# Altium PCB Temp_sense_Project 2.0(right angle.PcbDoc (part 5 of 5)
Units mm, origin at the board's own origin, x right, y up, seen from the top; angles counter-clockwise.
Board outline 238.12 x 109.47 mm, 4 copper layers (Top Layer, Layer 1, Layer 2, Bottom Layer), stack 0.603 mm thick; 185 components, 161 nets, 944 pads, 283 vias.
Unrouted connection lines stored in the file: 2.
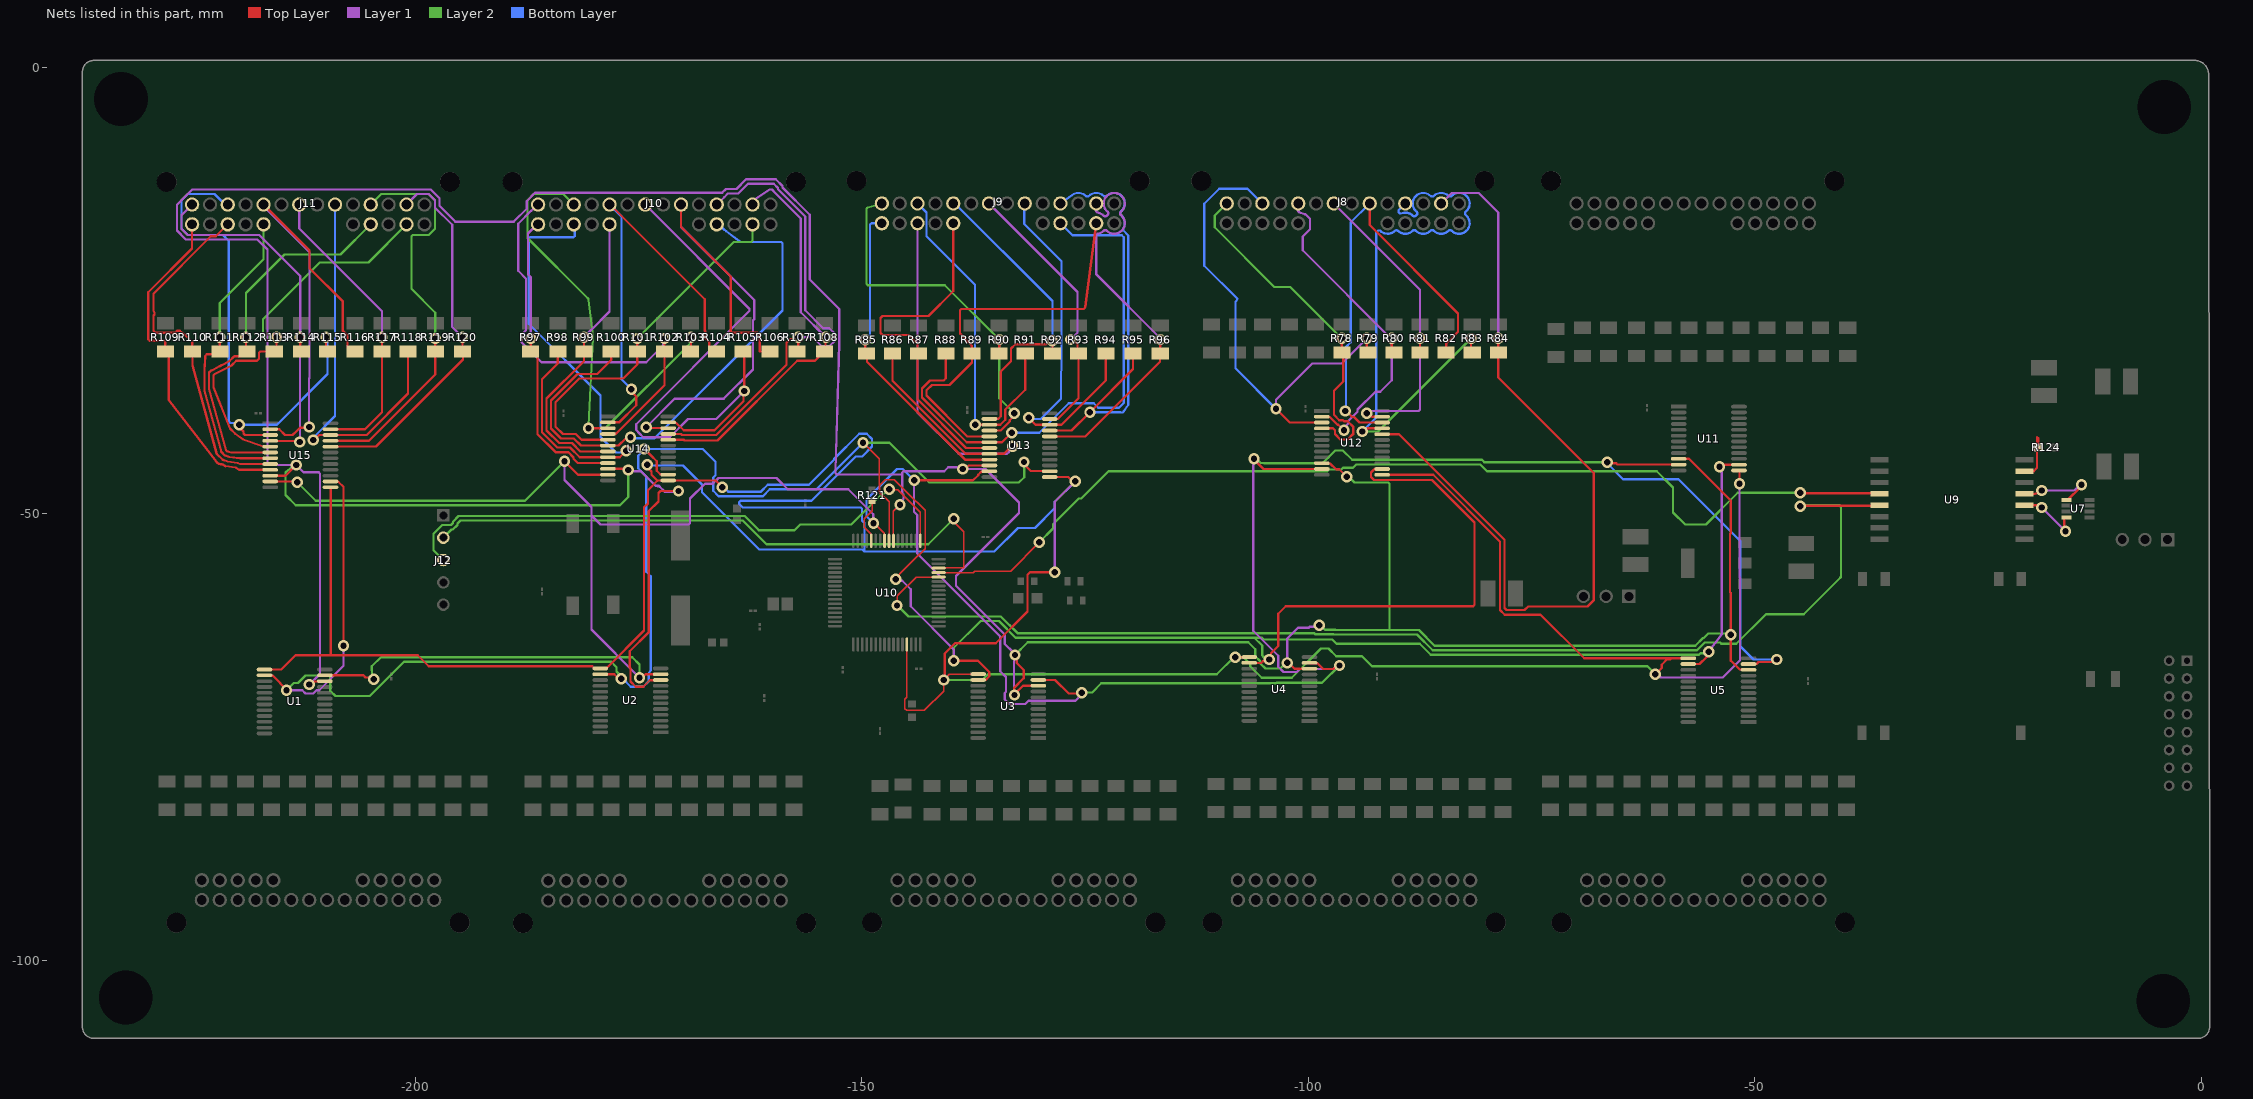
[diagram p6: the nets of this part, all layers, seen from the top]

## Via types
v1: diameter 1.27, hole 0.711, Top Layer to Bottom Layer, 278 vias
v2: diameter 0.711, hole 0.711, Top Layer to Bottom Layer, 4 vias
v3: diameter 1, hole 0.711, Top Layer to Bottom Layer, 1 vias

## Nets (pads, with @x,y where several pads share a name; then routed paths per layer and width w, separated by ;. In a path a pad name is that pad's centre, name@x,y a point inside that pad or via, vN(x,y) a via of type N, cw(c..) or ccw(c..) an arc to the next point about the centre after c; other vN are vias at no path point) (continued)
NetJ8_11: J8.11 R78.2 U12.4 | length 39.7
  Top Layer w0.254: U12.4@-98.489,-40.421 -97.232,-40.421 -97.019,-40.634 -97.019,-41.07 -96.424,-41.665 -95.582,-41.665 -94.987,-41.07 -94.987,-40.228 -95.582,-39.633 -95.995,-39.633 -96.122,-39.506 -96.535,-39.506 -97.13,-38.911 -97.13,-36.212 -96.105,-35.187 -96.105,-32.09 R78.2@-96.257,-31.937 v1(-96.257,-30.353)
  Layer 2 w0.254: J8.11@-109.135,-15.249 -110.481,-16.595 -110.481,-17.916 -103.808,-24.589 -102.021,-24.589 v1(-96.257,-30.353)
NetJ8_13: J8.13 R79.2 U12.3 | length 55.9
  Top Layer w0.254: v1(-103.623,-38.236) -102.088,-39.771 U12.3@-98.489,-39.771 ; v1(-93.463,-30.353) -93.463,-31.81 R79.2@-93.336,-31.937
  Layer 1 w0.254: v1(-103.623,-38.236) -103.623,-37.22 -99.555,-33.152 -96.261,-33.152 v1(-93.463,-30.353)
  Bottom Layer w0.254: J8.13@-105.147,-15.249 -106.798,-13.598 -109.973,-13.598 -111.646,-15.271 -111.646,-22.212 -107.941,-25.917 -108.125,-26.226 -108.16,-26.286 -108.16,-26.356 -108.16,-33.699 v1@-103.496,-38.363
NetJ8_15: J8.15 R80.2 U12.2 | length 37.9
  Top Layer w0.254: U12.2@-98.489,-39.121 -98.458,-39.152 -97.607,-39.152 -96.745,-40.014 -96.638,-40.014 v1(-96.003,-40.649) ; v1(-90.669,-30.353) -90.669,-31.683 R80.2@-90.415,-31.937
  Layer 1 w0.254: J8.15@-101.134,-15.249 -101.134,-16.128 -101.02,-16.241 -100.488,-16.439 -100.399,-16.455 -100.319,-16.455 -99.813,-16.961 -99.813,-17.281 -99.806,-17.288 -99.806,-18.127 -100.626,-18.947 -100.626,-20.498 v1@-90.796,-30.328 ; v1(-96.003,-40.649) -96.003,-40.374 -95.495,-39.866 -95.495,-39.564 -94.485,-38.554 -94.485,-38.326 -92.471,-36.313 -91.942,-36.313 -90.669,-35.04 v1(-90.669,-30.353)
NetJ8_17: J8.17 R81.2 U12.23 | length 36.7
  Top Layer w0.254: v1(-93.469,-38.747) -93.225,-38.747 -92.851,-39.121 U12.23@-91.739,-39.121 ; R81.2@-87.494,-31.937 v1(-87.494,-30.353)
  Layer 1 w0.254: J8.17@-97.146,-15.249 -87.494,-24.901 -87.494,-38.324 -87.643,-38.473 -92.92,-38.473 -93.194,-38.747 v1(-93.469,-38.747)
NetJ8_19: J8.19 R82.2 U12.22 | length 50.4
  Top Layer w0.254: v1(-95.854,-38.486) -95.735,-38.486 -95.076,-39.145 -94.897,-39.145 -94.282,-39.76 -93.55,-39.76 -93.539,-39.771 U12.22@-91.739,-39.771 ; J8.19@-93.133,-15.249 -93.133,-17.662 -83.239,-27.556 -83.239,-29.622 -84.573,-30.956 R82.2@-84.573,-31.937
  Bottom Layer w0.254: v1(-95.854,-38.486) -95.792,-38.424 -95.792,-31.325 -95.241,-30.774 -95.241,-17.357 J8.19@-93.133,-15.249
NetJ8_21: J8.21 R83.2 U12.21 | length 78.7
  Top Layer w0.254: v1(-93.971,-40.776) -93.696,-40.776 -93.341,-40.421 U12.21@-91.739,-40.421 ; v1(-81.779,-30.362) -81.779,-31.81 R83.2@-81.652,-31.937
  Layer 2 w0.254: v1(-93.971,-40.776) -92.193,-40.776 v1(-81.779,-30.362)
  Bottom Layer w0.254: v1(-93.971,-40.776) -92.402,-39.207 -92.402,-18.506 -92.179,-18.283 ; -89.908,-16.117 -89.908,-16.222 ; -89.908,-16.117 -89.908,-16.012 J8.21@-89.125,-15.229 ; -92.179,-18.283 -92.074,-18.283 -91.972,-18.283 ; -92.179,-18.283 -91.972,-18.283 ; -92.179,-18.283 -91.972,-18.283 ; -91.972,-18.283 ccw(c-91.126,-17.459) -90.31,-18.313 ; -91.972,-18.283 ccw(c-91.126,-17.459) -90.31,-18.313 ; -91.972,-18.283 ccw(c-91.126,-17.459) -90.31,-18.313 ; -90.31,-18.313 cw(c-90.136,-18.497) -89.96,-18.313 ccw(c-89.145,-17.459) -88.319,-18.303 cw(c-88.142,-18.485) -87.965,-18.303 ccw(c-87.138,-17.459) -86.312,-18.303 cw(c-86.135,-18.485) -85.958,-18.303 ccw(c-85.132,-17.459) -84.305,-18.303 cw(c-84.128,-18.485) -83.952,-18.303 ccw(c-83.125,-17.459) -82.372,-16.549 cw(c-82.209,-16.354) -82.372,-16.159 ccw(c-83.125,-15.249) -83.952,-14.405 cw(c-84.128,-14.223) -84.305,-14.405 ccw(c-85.132,-15.249) -85.958,-14.405 cw(c-86.135,-14.223) -86.312,-14.405 ccw(c-87.138,-15.249) -87.891,-16.159 cw(c-88.054,-16.354) -87.891,-16.549 ccw(c-87.138,-17.459) -87.965,-16.615 cw(c-88.142,-16.433) -88.318,-16.615 ; -89.908,-16.222 -89.833,-16.297 ; -89.908,-16.222 -89.833,-16.297 ; -89.908,-16.222 -89.833,-16.297 ; -89.833,-16.297 -89.759,-16.371 ; -89.833,-16.297 -89.759,-16.371 ; -89.833,-16.297 -89.759,-16.371 ; -89.759,-16.371 -89.654,-16.371 ; -89.653,-16.371 -89.445,-16.316 ; -89.653,-16.371 -89.445,-16.316 ; -89.653,-16.371 -89.445,-16.316 ; -89.445,-16.316 cw(c-89.145,-17.459) -88.318,-16.615 ; -89.445,-16.316 cw(c-89.145,-17.459) -88.318,-16.615 ; -89.445,-16.316 cw(c-89.145,-17.459) -88.318,-16.615
NetJ8_23: J8.23 R84.2 U12.20 | length 92.4
  Top Layer w0.254: U12.20@-91.739,-41.071 -89.857,-41.071 -78.032,-52.896 -78.032,-60.547 -77.809,-60.77 -75.791,-60.77 -75.383,-60.362 -68.736,-60.362 -68.063,-59.689 -68.063,-45.399 -78.731,-34.731 R84.2@-78.731,-31.937 v1(-78.731,-30.353)
  Layer 1 w0.254: J8.23@-85.132,-15.249 -83.951,-14.068 -80.928,-14.068 -78.731,-16.265 v1(-78.731,-30.353)
NetJ9_1: J9.1 R85.2 U13.9 | length 38.5
  Top Layer w0.254: U13.9@-135.7,-43.925 -138.447,-43.925 -149.398,-32.974 -149.398,-32.137 R85.2@-149.47,-32.064 R85.2@-149.597,-32.064 ; R85.2@-149.597,-32.064 v1(-149.597,-30.489) ; R85.2@-149.597,-32.064 v1(-149.597,-30.489) ; R85.2@-149.597,-32.064 v1(-149.597,-30.489)
  Bottom Layer w0.254: v1(-149.597,-30.489) -149.064,-29.956 -149.064,-17.608 -148.915,-17.459 J9.1@-147.743,-17.459
NetJ9_3: J9.3 R86.2 U13.8 | length 54.4
  Top Layer w0.254: R86.2@-146.549,-32.064 -146.549,-35.105 -138.379,-43.275 U13.8@-135.7,-43.275 -134.062,-43.275 -133.231,-42.444 v1(-133.11,-42.444)
  Layer 1 w0.254: J9.3@-143.755,-17.502 -143.755,-38.668 -139.148,-43.275 -133.728,-43.275 -133.549,-43.095 -133.549,-43.037 -133.11,-42.598 v1(-133.11,-42.444)
NetJ9_5: J9.5 R87.2 U13.7 | length 39.9
  Top Layer w0.254: J9.5@-139.742,-17.459 -139.742,-25.079 -142.518,-27.855 -147.66,-27.855 -147.883,-28.078 -147.883,-29.749 -147.66,-29.972 -144.739,-29.972 -143.755,-30.956 -143.755,-31.937 R87.2@-143.628,-32.064 -143.755,-32.191 -143.755,-37.18 -138.31,-42.625 U13.7@-135.7,-42.625
NetJ9_7: J9.7 R88.2 U13.6 | length 60.1
  Top Layer w0.254: R88.2@-140.58,-32.064 -140.58,-34.825 -140.816,-35.061 -142.354,-35.061 -143.247,-35.954 -143.247,-36.97 -138.242,-41.975 U13.6@-135.7,-41.975 -134.286,-41.975 v1(-133.214,-40.903)
  Bottom Layer w0.254: v1(-133.214,-40.903) -130.136,-40.903 -126.834,-37.601 -124.03,-37.601 -123.522,-38.109 -121.2,-38.109 -120.666,-37.576 -120.666,-19.034 -120.895,-18.805 -126.407,-18.805 J9.7@-127.753,-17.459
NetJ9_9: J9.9 R89.2 U13.5 | length 45.9
  Top Layer w0.254: R89.2@-137.668,-32.055 -137.668,-31.14 -139.005,-29.803 -139.005,-27.209 -138.856,-27.06 -125.235,-27.06 -125.161,-27.06 -125.013,-26.911 -124.983,-26.839 J9.9@-123.74,-17.459 ; R89.2@-137.659,-32.064 -137.659,-33.054 -140.174,-35.569 -142.144,-35.569 -142.739,-36.164 -142.739,-36.759 -138.173,-41.325 U13.5@-135.7,-41.325
NetJ9_11: J9.11 R90.2 U13.4 | length 42.1
  Top Layer w0.254: U13.4@-135.7,-40.675 -134.423,-40.675 -133.416,-39.668 -133.416,-39.527 -132.908,-39.019 v1(-132.908,-38.744) ; R90.2@-134.611,-32.064 v1(-134.611,-30.48)
  Layer 2 w0.254: J9.11@-147.743,-15.249 -149.287,-15.696 -149.349,-15.715 -149.396,-15.761 -149.47,-15.835 -149.47,-24.244 -149.321,-24.393 -140.698,-24.393 v1(-134.611,-30.48) -134.611,-37.041 v1(-132.908,-38.744)
NetJ9_13: J9.13 R91.2 U13.3 | length 39.4
  Top Layer w0.254: v1(-137.293,-40.007) -137.284,-40.016 -135.709,-40.016 U13.3@-135.7,-40.025 -134.491,-40.025 -133.924,-39.458 -133.924,-38.323 -131.69,-36.089 R91.2@-131.69,-32.064
  Bottom Layer w0.254: J9.13@-143.755,-15.249 -142.739,-16.265 -142.739,-18.932 -137.329,-24.342 -137.329,-39.971 v1(-137.293,-40.007)
NetJ9_15: J9.15 R92.2 U13.2 | length 69.2
  Top Layer w0.254: U13.2@-135.7,-39.375 -135.669,-39.344 -134.697,-39.344 -134.432,-39.079 -134.432,-34.055 -133.277,-32.9 -133.277,-31.473 -132.801,-30.997 -130.928,-30.997 -130.919,-31.006 -130.579,-31.006 ; -130.579,-30.997 -129.404,-30.997 -129.297,-30.89 -129.191,-30.89 v1@-128.917,-30.616 ; v1(-128.652,-30.616) v1@-128.917,-30.616 ; R92.2@-128.642,-32.064 v1@-128.642,-30.891 ; v1@-128.917,-30.616 v1@-128.642,-30.891 ; v1@-128.917,-30.616 v1@-128.642,-30.891 ; v1@-128.917,-30.616 v1@-128.642,-30.891
  Bottom Layer w0.254: v1(-128.652,-30.616) -128.642,-29.683 -128.642,-26.171 ; J9.15@-139.938,-14.875 -128.642,-26.171 ; J9.15@-139.938,-14.875 -128.642,-26.171 ; J9.15@-139.938,-14.875 -128.642,-26.171
NetJ9_17: J9.17 R93.2 U13.23 | length 30.9
  Top Layer w0.254: U13.23@-128.95,-39.375 -128.054,-39.375 -125.721,-37.042 R93.2@-125.721,-32.064 -125.848,-31.937 -125.848,-31.006 -126.374,-30.48 v1(-126.62,-30.48)
  Layer 1 w0.254: J9.17@-135.754,-15.249 -125.848,-25.155 -125.848,-29.708 v1(-126.62,-30.48)
NetJ9_19: J9.19 R94.2 U13.22 | length 42.2
  Top Layer w0.254: v1(-131.309,-39.252) -130.536,-40.025 U13.22@-128.95,-40.025 -127.637,-40.025 -122.673,-35.061 R94.2@-122.673,-32.064
  Bottom Layer w0.254: J9.19@-131.741,-15.249 -131.817,-15.325 -131.817,-17.535 -127.626,-21.726 -127.636,-30.059 -127.636,-30.901 -127.7,-37.117 -129.961,-39.377 -131.184,-39.377 v1(-131.309,-39.252)
NetJ9_21: J9.21 R95.2 U13.21 | length 57
  Top Layer w0.254: U13.21@-128.95,-40.675 -126.509,-40.675 v1(-124.451,-38.617) -119.625,-33.791 R95.2@-119.625,-32.064
  Bottom Layer w0.254: v1(-124.451,-38.617) -121.022,-38.617 -120.999,-38.64 -120.788,-38.64 -120.69,-38.542 -120.158,-37.786 -120.158,-18.823 -120.728,-18.253 -120.728,-18.148 -120.728,-18.08 ccw(c-121.733,-17.459) -120.98,-16.549 cw(c-120.817,-16.354) -120.98,-16.159 ccw(c-121.733,-15.249) -122.56,-14.405 cw(c-122.736,-14.223) -122.913,-14.405 ccw(c-123.74,-15.249) -124.566,-14.405 cw(c-124.743,-14.223) -124.92,-14.406 ; J9.21@-127.753,-15.249 -126.442,-14.295 ; J9.21@-127.753,-15.249 -126.442,-14.295 ; J9.21@-127.753,-15.249 -126.442,-14.295 ; -126.442,-14.295 cw(c-125.746,-15.249) -124.92,-14.406 ; -126.442,-14.295 cw(c-125.746,-15.249) -124.92,-14.406 ; -126.442,-14.295 cw(c-125.746,-15.249) -124.92,-14.406
NetJ9_23: J9.23 R96.2 U13.20 | length 58
  Top Layer w0.254: U13.20@-128.95,-41.325 -124.966,-41.325 -116.615,-32.974 -116.615,-32.103 R96.2@-116.577,-32.064 v1(-116.577,-30.48)
  Layer 1 w0.254: J9.23@-123.74,-15.249 -123.74,-16.152 -123.665,-16.226 ccw(c-123.486,-16.046) -123.664,-16.227 ; v1(-116.577,-30.48) -116.577,-30.337 -123.665,-23.248 -123.74,-23.174 -123.74,-18.766 -123.665,-18.692 ; -123.665,-18.692 -123.606,-18.632 ; -123.665,-18.692 -123.606,-18.632 ; -123.665,-18.692 -123.606,-18.632 ; -123.664,-16.227 -123.329,-16.352 ; -123.664,-16.227 -123.329,-16.352 ; -123.664,-16.227 -123.329,-16.352 ; -123.606,-18.632 ccw(c-123.74,-17.459) -122.913,-18.302 ; -123.606,-18.632 ccw(c-123.74,-17.459) -122.913,-18.302 ; -123.606,-18.632 ccw(c-123.74,-17.459) -122.913,-18.302 ; -123.329,-16.352 cw(c-123.74,-17.459) -122.913,-16.615 ccw(c-122.736,-16.433) -122.56,-16.615 cw(c-121.733,-17.459) -122.486,-16.549 ccw(c-122.649,-16.354) -122.486,-16.159 cw(c-121.733,-15.249) -120.98,-16.159 ccw(c-120.817,-16.354) -120.98,-16.549 ; -122.913,-18.302 cw(c-122.736,-18.485) -122.56,-18.303 ; -122.913,-18.302 cw(c-122.736,-18.485) -122.56,-18.303 ; -122.913,-18.302 cw(c-122.736,-18.485) -122.56,-18.303 ; -122.56,-18.303 ccw(c-121.733,-17.459) -120.98,-16.549 ; -122.56,-18.303 ccw(c-121.733,-17.459) -120.98,-16.549 ; -122.56,-18.303 ccw(c-121.733,-17.459) -120.98,-16.549
NetJ10_1: J10.1 R97.2 U14.9 | length 37.4
  Top Layer w0.254: v1(-187.062,-30.362) R97.2@-187.062,-31.81 -186.851,-31.81 -186.3,-32.361 -186.3,-41.074 -184.289,-43.085 -182.854,-43.085 -182.259,-43.68 -182.259,-43.832 -181.785,-44.306 U14.9@-178.626,-44.306
  Layer 1 w0.254: v1(-187.062,-30.362) -187.062,-23.468 -187.367,-23.163 -187.367,-18.602 ; J10.1@-185.932,-17.167 -186.132,-17.455 J10.1@-186.22,-17.455 ; -187.367,-18.602 J10.1@-186.22,-17.455 ; -187.367,-18.602 J10.1@-186.22,-17.455 ; -187.367,-18.602 J10.1@-186.22,-17.455
NetJ10_3: J10.3 R98.2 U14.8 | length 56.5
  Top Layer w0.254: R98.2@-184.014,-31.81 -184.014,-33.156 -185.792,-34.934 -185.792,-40.863 -184.078,-42.577 -182.644,-42.577 -181.565,-43.656 U14.8@-178.413,-43.656 -177.085,-43.656 v1(-176.364,-42.935)
  Bottom Layer w0.254: J10.3@-182.236,-17.586 -182.118,-18.009 -182.109,-18.018 -182.109,-18.203 -182.109,-18.889 -182.258,-19.038 -187.116,-19.038 -187.265,-19.187 -187.265,-28.722 -179.239,-36.748 -179.239,-41.395 -177.507,-43.127 -176.556,-43.127 v1(-176.364,-42.935)
NetJ10_5: J10.5 R99.2 U14.7 | length 33.6
  Top Layer w0.254: v1(-181.093,-30.235) -181.093,-32.902 -185.284,-37.093 -185.284,-40.653 -183.868,-42.069 -182.433,-42.069 -181.496,-43.006 U14.7@-178.626,-43.006
  Layer 1 w0.254: v1(-181.093,-30.235) -180.29,-29.423 cw(c-180.11,-29.602) -180.289,-29.422 -178.223,-27.356 J10.5@-178.223,-17.586
NetJ10_7: J10.7 R100.2 U14.6 | length 62.9
  Top Layer w0.254: R100.2@-178.045,-31.81 -178.045,-32.775 -179.618,-34.348 -181.82,-34.348 -184.776,-37.303 -184.776,-40.442 -183.657,-41.561 -182.223,-41.561 -181.428,-42.356 U14.6@-178.413,-42.356 -177.222,-42.356 -176.471,-41.605 -176.08,-41.605 v1(-175.886,-41.411)
  Bottom Layer w0.254: v1(-175.886,-41.411) -175.759,-41.538 -173.188,-41.538 -158.868,-27.218 -158.868,-19.716 -159.017,-19.567 -163.462,-19.567 -163.567,-19.567 -165.159,-18.362 -165.352,-18.216 ; J10.7@-166.234,-17.586 -165.813,-17.586 J10.7@-165.739,-17.66 ; J10.7@-165.739,-17.66 J10.7@-165.693,-17.706 ; J10.7@-165.739,-17.66 J10.7@-165.693,-17.706 ; J10.7@-165.739,-17.66 J10.7@-165.693,-17.706 ; J10.7@-165.693,-17.706 ccw(c-164.785,-17.467) -165.352,-18.216 ; J10.7@-165.693,-17.706 ccw(c-164.785,-17.467) -165.352,-18.216 ; J10.7@-165.693,-17.706 ccw(c-164.785,-17.467) -165.352,-18.216
NetJ10_9: J10.9 R101.2 U14.5 | length 42.1
  Top Layer w0.254: U14.5@-178.626,-41.706 -181.359,-41.706 -182.012,-41.053 -183.447,-41.053 -184.268,-40.232 -184.268,-37.514 -181.61,-34.856 -176.697,-34.856 -175.124,-33.283 R101.2@-175.124,-31.81 v1(-175.124,-30.362)
  Layer 2 w0.254: v1(-175.124,-30.362) -164.329,-19.567 -162.37,-19.567 -162.221,-19.418 J10.9@-162.221,-17.586
NetJ10_11: J10.11 R102.2 U14.4 | length 49.2
  Top Layer w0.254: U14.4@-178.413,-41.056 -178.382,-41.025 -177.512,-41.025 -172.076,-35.59 R102.2@-172.076,-31.81 v1(-172.076,-30.362)
  Layer 1 w0.254: J10.11@-186.224,-15.376 -186.287,-15.376 -186.986,-16.074 -187.025,-16.074 -188.459,-17.508 -188.459,-17.789 -188.459,-22.79 -187.57,-23.679 -187.57,-29.433 -188.078,-29.941 -188.078,-30.783 -185.832,-33.029 -174.108,-33.029 -172.223,-31.144 -172.223,-30.509 v1(-172.076,-30.362)
NetJ10_13: J10.13 R103.2 U14.3 | length 129.5
  Top Layer w0.254: v1(-180.585,-40.395) -180.579,-40.401 -178.632,-40.401 U14.3@-178.626,-40.406 ; R103.2@-169.155,-31.81 -169.104,-31.76 v1(-169.104,-30.226)
  Layer 2 w0.254: J10.13@-182.236,-15.376 -183.417,-14.195 -186.713,-14.195 -187.405,-14.887 -187.405,-19.103 ; v1(-169.104,-30.226) v1@-169.104,-30.714 ; -187.405,-19.103 -180.659,-25.848 ; -187.405,-19.103 -180.659,-25.848 ; -187.405,-19.103 -180.659,-25.848 ; -180.659,-25.848 cw(c-180.839,-26.028) -180.585,-26.028 ; -180.659,-25.848 cw(c-180.839,-26.028) -180.585,-26.028 ; -180.659,-25.848 cw(c-180.839,-26.028) -180.585,-26.028 ; v1(-180.585,-40.395) -178.68,-40.395 ; v1(-180.585,-40.395) v1@-180.585,-40.141 ; v1(-180.585,-40.395) v1@-180.585,-40.141 ; v1(-180.585,-40.395) v1@-180.585,-40.141 ; v1@-180.585,-40.141 cw(c-180.331,-40.141) v1@-180.585,-40.128 ; v1@-180.585,-40.141 cw(c-180.331,-40.141) v1@-180.585,-40.128 ; v1@-180.585,-40.141 cw(c-180.331,-40.141) v1@-180.585,-40.128 ; v1@-180.585,-40.128 -180.078,-30.287 ; v1@-180.585,-40.128 -180.078,-30.287 ; v1@-180.585,-40.128 -180.078,-30.287 ; -180.585,-26.028 ccw(c-180.331,-26.028) -180.583,-26.059 ; -180.585,-26.028 ccw(c-180.331,-26.028) -180.583,-26.059 ; -180.585,-26.028 ccw(c-180.331,-26.028) -180.583,-26.059 ; -180.583,-26.059 -180.085,-30.111 ; -180.583,-26.059 -180.085,-30.111 ; -180.583,-26.059 -180.085,-30.111 ; -180.085,-30.111 cw(c-181.093,-30.235) -180.078,-30.287 ; -180.085,-30.111 cw(c-181.093,-30.235) -180.078,-30.287 ; -180.085,-30.111 cw(c-181.093,-30.235) -180.078,-30.287 ; -178.68,-40.395 -169.178,-30.893 ; -178.68,-40.395 -169.178,-30.893 ; -178.68,-40.395 -169.178,-30.893 ; -169.178,-30.893 ccw(c-169.358,-30.714) v1@-169.104,-30.714 ; -169.178,-30.893 ccw(c-169.358,-30.714) v1@-169.104,-30.714 ; -169.178,-30.893 ccw(c-169.358,-30.714) v1@-169.104,-30.714
NetJ10_15: J10.15 R104.2 U14.2 | length 81.7
  Top Layer w0.254: U14.2@-178.413,-39.756 -177.156,-39.756 -175.251,-37.851 -175.251,-36.86 -175.779,-36.332 v1(-175.779,-36.057) ; R104.2@-166.234,-31.81 R104.2@-167.06,-31.81 ; J10.15@-178.197,-15.351 -167.568,-25.98 ; J10.15@-178.197,-15.351 -167.568,-25.98 ; J10.15@-178.197,-15.351 -167.568,-25.98 ; -167.568,-25.98 -167.568,-29.495 -167.504,-29.559 -167.504,-30.32 -167.06,-30.764 ; R104.2@-167.06,-31.81 -167.06,-30.764 ; R104.2@-167.06,-31.81 -167.06,-30.764 ; R104.2@-167.06,-31.81 -167.06,-30.764
  Bottom Layer w0.254: J10.15@-178.223,-15.376 -176.902,-16.697 -176.902,-34.934 v1(-175.779,-36.057)
NetJ10_17: J10.17 R105.2 U14.23 | length 65.8
  Top Layer w0.254: U14.23@-171.662,-39.756 -171.631,-39.787 -170.849,-39.787 -170.818,-39.818 -170.749,-39.818 -169.918,-40.649 -166.488,-40.649 -163.226,-37.387 -163.226,-36.324 v1(-163.146,-36.244) ; R105.2@-163.313,-31.81 -163.146,-31.977 v1@-163.146,-36.204 ; v1@-163.166,-36.224 v1@-163.146,-36.204 ; v1@-163.166,-36.224 v1@-163.146,-36.204 ; v1@-163.166,-36.224 v1@-163.146,-36.204 ; v1@-163.166,-36.224 v1@-163.146,-36.204 ; v1@-163.166,-36.224 v1@-163.146,-36.204
  Layer 1 w0.254: J10.17@-174.235,-15.376 -162.549,-27.062 -162.549,-27.272 -175.251,-39.974 -175.251,-40.609 -174.87,-40.99 -174.45,-41.411 -171.485,-41.411 -169.453,-39.379 -166.281,-39.379 v1(-163.146,-36.244)
NetJ10_19: J10.19 R106.2 U14.22 | length 62
  Top Layer w0.254: v1(-174.129,-40.295) -174.049,-40.375 -171.907,-40.375 U14.22@-171.876,-40.406 ; J10.19@-170.222,-15.376 -170.222,-17.865 -164.659,-23.428 -164.659,-29.727 -161.66,-29.727 -161.408,-29.979 -161.408,-31.81 R106.2@-160.265,-31.81
  Layer 1 w0.254: v1(-174.129,-40.295) -174.129,-40.289 -170.958,-37.118 -165.458,-37.118 -162.17,-33.831 -162.17,-28.33 -162.041,-28.201 -162.041,-26.061 -170.222,-17.88 J10.19@-170.222,-15.188
NetJ10_21: J10.21 R107.2 U14.21 | length 55.1
  Top Layer w0.254: U14.21@-171.662,-41.056 -170.229,-41.056 -170.129,-41.157 -166.278,-41.157 -158.423,-33.302 -158.423,-30.847 -157.997,-30.421 -157.284,-30.421 v1(-157.09,-30.226) -157.09,-31.683 R107.2@-157.217,-31.81
  Layer 1 w0.254: J10.21@-166.234,-15.376 -165.4,-14.543 -164.984,-14.126 -164.395,-14.126 -163.807,-14.126 -162.728,-13.048 -159.843,-13.048 -159.376,-13.515 -159.376,-13.667 -156.328,-16.715 -156.328,-27.205 -154.323,-29.21 -153.621,-29.21 -153.026,-29.805 -153.026,-30.647 -153.621,-31.242 -154.463,-31.242 -155.479,-30.226 v1(-157.09,-30.226)
NetJ10_23: J10.23 R108.2 U14.20 | length 45.2
  Top Layer w0.254: U14.20@-171.662,-41.706 -169.933,-41.706 -169.847,-41.792 -166.151,-41.792 -157.228,-32.869 -155.228,-32.869 R108.2@-154.169,-31.81 -154.042,-31.683 v1(-154.042,-30.226)
  Layer 1 w0.254: J10.23@-162.221,-15.376 -161.901,-14.738 -160.273,-13.696 -160.033,-13.696 -159.884,-13.845 -159.884,-13.878 -156.836,-16.926 -156.836,-27.416 -154.042,-30.21 v1(-154.042,-30.226)
NetJ11_1: J11.1 R109.2 U15.9 | length 39.5
  Top Layer w0.254: J11.1@-224.959,-17.586 -224.959,-20.296 -229.861,-25.199 -229.861,-30.461 -229.712,-30.61 -228.105,-30.61 -227.956,-30.759 R109.2@-227.956,-31.81 -227.587,-32.361 -227.587,-37.208 -222.212,-44.187 ccw(c-221.667,-43.767) -221.645,-44.454 ; U15.9@-216.218,-45.068 -219.665,-45.068 -220.092,-44.799 -221.212,-44.652 ; -221.645,-44.454 cw(c-221.709,-44.991) -221.348,-44.589 ; -221.645,-44.454 cw(c-221.709,-44.991) -221.348,-44.589 ; -221.645,-44.454 cw(c-221.709,-44.991) -221.348,-44.589 ; -221.348,-44.589 -221.346,-44.591 ; -221.348,-44.589 -221.346,-44.591 ; -221.348,-44.589 -221.346,-44.591 ; -221.346,-44.591 ccw(c-221.178,-44.401) -221.212,-44.652 ; -221.346,-44.591 ccw(c-221.178,-44.401) -221.212,-44.652 ; -221.346,-44.591 ccw(c-221.178,-44.401) -221.212,-44.652
NetJ11_3: J11.3 R110.2 U15.8 | length 42.2
  Top Layer w0.254: J11.3@-220.971,-17.586 -222.317,-18.932 -222.876,-18.932 -229.29,-25.346 -229.29,-27.243 -229.29,-27.285 -229.17,-27.493 -229.17,-27.704 -229.239,-27.773 -229.29,-27.824 -229.29,-29.495 -229.067,-29.718 -226.845,-29.718 -226.662,-29.535 -226.63,-29.503 -226.419,-29.503 -226.333,-29.508 -225.855,-29.854 -225.79,-29.908 -224.957,-30.74 ; U15.8@-216.218,-44.418 -219.597,-44.418 -219.865,-44.295 -221.001,-44.145 -221.383,-43.982 -221.532,-43.949 -222.191,-43.29 -224.899,-33.473 -224.908,-33.405 R110.2@-224.908,-31.81 R110.2@-224.957,-31.81 ; R110.2@-224.957,-31.81 -224.957,-30.74 ; R110.2@-224.957,-31.81 -224.957,-30.74 ; R110.2@-224.957,-31.81 -224.957,-30.74
NetJ11_5: J11.5 R111.2 U15.7 | length 34.8
  Top Layer w0.254: v1(-221.86,-30.226) R111.2@-221.86,-31.81 -222.186,-32.137 -223.321,-32.137 -223.499,-32.315 -223.574,-33.974 -223.574,-36.224 -221.683,-43.08 -221.297,-43.465 -221.163,-43.499 -220.805,-43.632 ; U15.7@-216.218,-43.768 -219.59,-43.768 -220.781,-43.636 ; -220.805,-43.632 ccw(c-220.753,-43.383) -220.781,-43.636 ; -220.805,-43.632 ccw(c-220.753,-43.383) -220.781,-43.636 ; -220.805,-43.632 ccw(c-220.753,-43.383) -220.781,-43.636
  Layer 2 w0.254: v1(-221.86,-30.226) -221.86,-26.402 -216.958,-21.5 J11.5@-216.958,-17.586
NetJ11_7: J11.7 R112.2 U15.6 | length 60.2
  Top Layer w0.254: R112.2@-218.812,-31.81 -218.9,-31.869 R112.2@-219.638,-32.361 ; -222.738,-33.931 -222.777,-33.942 -222.841,-33.96 -222.889,-34.007 -222.991,-34.11 -223.038,-34.156 -223.066,-34.268 -223.066,-36.014 -221.175,-42.869 -221.052,-42.992 ; -222.738,-33.931 -221.855,-33.468 ; -222.738,-33.931 -221.855,-33.468 ; -222.738,-33.931 -221.855,-33.468 ; -221.855,-33.468 ccw(c-221.974,-33.243) -221.812,-33.438 ; -221.855,-33.468 ccw(c-221.974,-33.243) -221.812,-33.438 ; -221.855,-33.468 ccw(c-221.974,-33.243) -221.812,-33.438 ; -221.812,-33.438 ccw(c-221.974,-33.243) -221.809,-33.436 ; -221.812,-33.438 ccw(c-221.974,-33.243) -221.809,-33.436 ; -221.812,-33.438 ccw(c-221.974,-33.243) -221.809,-33.436 ; -221.808,-33.436 cw(c-221.643,-33.629) -221.765,-33.406 ; -221.808,-33.436 cw(c-221.643,-33.629) -221.765,-33.406 ; -221.808,-33.436 cw(c-221.643,-33.629) -221.765,-33.406 ; -221.765,-33.406 -221.704,-33.372 ; -221.765,-33.406 -221.704,-33.372 ; -221.765,-33.406 -221.704,-33.372 ; -221.704,-33.372 -220.749,-32.869 ; -221.052,-42.992 -220.59,-43.115 ; -221.052,-42.992 -220.59,-43.115 ; -221.052,-42.992 -220.59,-43.115 ; -220.749,-32.869 -220.316,-32.436 ; -220.749,-32.869 -220.316,-32.436 ; -220.749,-32.869 -220.316,-32.436 ; -220.59,-43.115 ccw(c-220.554,-42.864) -220.554,-43.118 ; -220.59,-43.115 ccw(c-220.554,-42.864) -220.554,-43.118 ; -220.59,-43.115 ccw(c-220.554,-42.864) -220.554,-43.118 ; -220.554,-43.118 U15.6@-216.218,-43.118 ; -220.554,-43.118 U15.6@-216.218,-43.118 ; -220.554,-43.118 U15.6@-216.218,-43.118 ; -220.316,-32.436 cw(c-220.137,-32.616) -220.139,-32.362 ; -220.316,-32.436 cw(c-220.137,-32.616) -220.139,-32.362 ; -220.316,-32.436 cw(c-220.137,-32.616) -220.139,-32.362 ; -220.139,-32.362 -220.036,-32.361 ; -220.036,-32.361 cw(c-220.031,-32.869) -220.031,-32.361 ; -220.036,-32.361 cw(c-220.031,-32.869) -220.031,-32.361 ; -220.036,-32.361 cw(c-220.031,-32.869) -220.031,-32.361 ; -220.031,-32.361 R112.2@-219.638,-32.361 ; -220.031,-32.361 R112.2@-219.638,-32.361 ; -220.031,-32.361 R112.2@-219.638,-32.361 ; R112.2@-218.939,-31.81 v1(-218.939,-30.235) ; R112.2@-218.939,-31.81 v1(-218.939,-30.235) ; R112.2@-218.939,-31.81 v1(-218.939,-30.235)
  Layer 2 w0.254: v1(-218.939,-30.235) -218.939,-25.282 -214.621,-20.964 -208.347,-20.964 J11.7@-204.969,-17.586
NetJ11_9: J11.9 R113.2 U15.5 | length 45.1
  Top Layer w0.254: U15.5@-216.218,-42.468 -216.887,-42.468 -217.131,-42.407 -219.244,-41.676 -220.122,-41.03 -220.717,-40.435 -222.557,-35.825 -222.558,-35.803 -222.558,-34.566 -222.558,-34.478 -222.42,-34.34 -220.539,-33.377 -220.031,-32.869 -217.701,-32.869 -217.478,-32.646 -217.478,-31.959 -217.329,-31.81 R113.2@-215.764,-31.81 -215.51,-31.556 v1(-215.51,-30.235)
  Layer 2 w0.254: v1(-215.51,-30.235) -216.78,-30.235 -217.034,-29.981 -217.034,-28.203 -210.684,-21.853 -205.223,-21.853 J11.9@-200.956,-17.586
NetJ11_11: J11.11 R114.2 U15.4 | length 42.3
  Top Layer w0.254: U15.4@-216.218,-41.818 -216.187,-41.849 -213.004,-41.849 v1(-212.896,-41.957) ; v1(-212.843,-30.235) -212.843,-31.683 R114.2@-212.716,-31.81
  Layer 1 w0.254: J11.11@-224.959,-15.376 -226.14,-16.557 -226.14,-18.075 -225.448,-18.767 -217.447,-18.767 -212.843,-23.371 v1(-212.843,-30.235) -212.881,-30.273 -212.881,-41.942 v1(-212.896,-41.957)
NetJ11_13: J11.13 R115.2 U15.3 | length 59
  Top Layer w0.254: v1(-219.701,-40.014) -219.701,-40.289 -219.214,-40.776 -219.214,-40.988 -219.034,-41.168 U15.3@-216.218,-41.168 ; v1(-209.973,-30.235) -209.973,-31.633 R115.2@-209.795,-31.81
  Bottom Layer w0.254: v1(-209.973,-30.235) -209.795,-30.413 -209.795,-34.352 -215.457,-40.014 v1(-219.701,-40.014) -219.895,-39.82 -220.657,-39.82 -220.844,-39.633 -220.844,-19.424 -221.501,-18.767 -225.448,-18.767 -226.14,-18.075 -226.14,-14.887 -225.448,-14.195 -222.463,-14.195 -221.566,-15.092 J11.13@-221.544,-15.092 ; J11.13@-221.544,-15.092 J11.13@-221.352,-14.899 ; J11.13@-221.544,-15.092 J11.13@-221.352,-14.899 ; J11.13@-221.544,-15.092 J11.13@-221.352,-14.899
NetJ11_15: J11.15 R116.2 U15.2 | length 52.6
  Top Layer w0.254: J11.15@-216.958,-15.376 -211.827,-20.507 -211.827,-22.488 -208.081,-26.234 -208.081,-29.495 -207.573,-30.003 -207.573,-31.26 -207.022,-31.81 R116.2@-206.747,-31.81 ; U15.2@-216.218,-40.518 -215.209,-40.518 -214.569,-41.158 -213.727,-41.158 -213.599,-41.03 -213.565,-41.03 -212.881,-40.346 -211.93,-40.346 v1(-211.865,-40.28)
  Layer 1 w0.254: J11.15@-216.907,-15.63 -211.827,-20.71 -211.827,-34.794 -211.865,-34.831 v1(-211.865,-40.28)
NetJ11_17: J11.17 R117.2 U15.23 | length 33.6
  Top Layer w0.254: U15.23@-209.468,-40.518 -205.6,-40.518 -203.699,-38.617 R117.2@-203.699,-31.81 v1(-203.699,-30.226)
  Layer 1 w0.254: J11.17@-212.97,-15.376 -212.97,-18.043 -203.699,-27.314 v1(-203.699,-30.226)
NetJ11_19: J11.19 R118.2 U15.22 | length 44.8
  Top Layer w0.254: v1(-211.389,-41.728) -211.285,-41.728 -210.725,-41.168 U15.22@-209.468,-41.168 -205.412,-41.168 -200.778,-36.534 R118.2@-200.778,-31.81
  Bottom Layer w0.254: v1(-211.389,-41.728) -211.389,-41.481 -208.957,-39.049 J11.19@-208.957,-15.376
NetJ11_21: J11.21 R119.2 U15.21 | length 45.5
  Top Layer w0.254: U15.21@-209.468,-41.818 -205.147,-41.818 -197.73,-34.401 R119.2@-197.73,-31.81 v1(-197.73,-30.362)
  Layer 2 w0.254: J11.21@-204.969,-15.376 -203.788,-14.195 -198.46,-14.195 -197.768,-14.887 -197.768,-18.075 -198.46,-18.767 -200.248,-18.767 -200.397,-18.916 -200.397,-24.807 -197.73,-27.474 v1(-197.73,-30.362)
NetJ11_23: J11.23 R120.2 U15.20 | length 42
  Top Layer w0.254: U15.20@-209.468,-42.468 -204.375,-42.468 -194.627,-32.72 -194.627,-31.865 R120.2@-194.682,-31.81 v1(-194.682,-30.235)
  Layer 1 w0.254: J11.23@-200.956,-15.376 -199.775,-14.195 -198.46,-14.195 -197.768,-14.887 -197.768,-15.719 -195.85,-17.637 -195.85,-29.067 v1(-194.682,-30.235)
NetJ12_2: J12.2 U10.46 | length 69.1
  Top Layer w0.15: U10.46@-141.39,-56.066 -141.381,-56.057 -138.636,-56.057 -138.548,-55.969 -138.548,-52.001 -139.691,-50.858 v1(-139.691,-50.555)
  Layer 2 w0.254: J12.2@-196.841,-52.667 -195.93,-51.756 -195.773,-51.756 -195.252,-51.235 -195.252,-51.078 -194.916,-50.742 -163.313,-50.742 -160.646,-53.409 -142.545,-53.409 v1(-139.691,-50.555)
NetJ12_3: J12.3 U10.49 | length 65.6
  Top Layer w0.15: v1(-146.898,-47.26) -146.848,-47.31 -145.937,-47.31 -143.44,-49.807 U10.49@-143.44,-53.016
  Layer 2 w0.254: J12.3@-196.841,-55.167 -197.933,-54.075 -197.933,-52.23 -196.951,-51.248 -195.983,-51.248 -195.76,-51.025 -195.76,-50.868 -195.126,-50.234 -163.102,-50.234 -161.511,-51.825 -157.511,-51.825 -156.876,-51.19 -151.161,-51.19 -147.873,-47.902 -147.693,-47.902 -147.052,-47.26 v1(-146.898,-47.26)
NetR121_2: R121.2 U10.60 | length 5.2
  Top Layer w0.15: U10.60@-148.94,-53.016 -148.948,-53.007 -148.948,-52.253 -149.263,-51.939 -149.269,-51.939 -149.724,-51.484 -149.724,-50.557 -148.835,-49.668 R121.2@-148.835,-48.514
NetR124_1: R124.1 U9.7 | length 19.9
  Top Layer w0.254: U9.7@-19.809,-45.221 -18.798,-45.221 -18.417,-44.84 ; R124.1@-18.29,-42.554 -18.29,-41.538 -18.417,-41.411 ; -18.417,-44.84 R124.1@-18.417,-42.554 ; -18.417,-44.84 R124.1@-18.417,-42.554 ; -18.417,-44.84 -18.417,-41.411 ; -18.417,-44.84 -18.417,-41.411 ; -18.417,-44.84 -18.417,-41.411 ; R124.1@-18.417,-42.554 -18.417,-41.411 ; R124.1@-18.417,-42.554 -18.417,-41.411
NetU1_10: U1.10 U2.10 U3.10 U4.10 U5.10 U10.55 U11.10 U12.10 U13.10 U14.10 U15.10 | length 484
  Top Layer w0.15: U10.55@-146.44,-53.016 -146.461,-52.995 -146.461,-49.71 v1(-145.717,-48.966)
  Top Layer w0.254: U15.10@-216.224,-45.723 U15.10@-216.218,-45.718 -214.506,-45.718 v1(-213.316,-44.528) ; v1(-211.832,-69.097) -211.557,-69.097 -211.218,-68.758 -210.134,-68.758 U1.10@-210.103,-68.727 ; U14.10@-178.413,-44.956 -176.278,-44.956 v1(-176.14,-45.094) ; U2.10@-172.511,-68.6 -172.542,-68.631 -173.729,-68.631 -174.449,-69.351 -175.291,-69.351 -175.886,-68.756 -175.886,-67.279 -175.964,-67.201 -175.964,-65.379 -173.854,-63.269 -173.854,-49.717 -172.737,-48.6 -172.737,-47.656 -172.518,-47.437 v1(-170.511,-47.437) ; v1(-138.675,-44.967) -138.4,-44.967 -138.014,-44.58 -135.706,-44.58 U13.10@-135.7,-44.575 ; v1(-132.893,-70.277) -132.96,-70.209 -132.96,-69.478 -131.868,-68.386 -131.868,-67.468 -132.639,-66.697 -132.639,-65.989 v1(-132.833,-65.795) ; U3.10@-130.22,-69.235 -131.955,-69.235 ; v1(-102.353,-66.684) -102.208,-66.684 -101.562,-67.33 U4.10@-99.867,-67.33 ; U12.10@-98.489,-44.321 -98.458,-44.352 -97.561,-44.352 -96.907,-45.007 -96.551,-45.007 v1(-95.701,-45.856) ; U11.10@-58.538,-43.839 -57.378,-43.839 -52.698,-48.519 -52.698,-52.152 -52.786,-52.24 -52.786,-58.776 -52.698,-58.864 -52.698,-66.428 -51.7,-67.426 -50.749,-67.426 U5.10@-50.718,-67.457 ; v1@-132.96,-70.24 v1@-132.945,-70.225 ; v1@-132.96,-70.24 v1@-132.945,-70.225 ; v1@-132.96,-70.24 -131.955,-69.235 ; v1@-132.945,-70.225 -131.955,-69.235 ; v1@-132.945,-70.225 -131.955,-69.235
  Layer 1 w0.254: v1(-211.832,-69.097) -210.646,-67.911 -210.646,-45.497 -210.794,-45.348 -212.496,-45.348 v1(-213.316,-44.528) -216.377,-44.528 -216.526,-44.379 -216.526,-20.406 -217.657,-19.275 -225.658,-19.275 -226.648,-18.285 -226.648,-15.395 -224.94,-13.687 -198.25,-13.687 -197.26,-14.676 -197.26,-15.509 -195.488,-17.281 -188.951,-17.281 -187.51,-15.841 -187.51,-14.992 -186.553,-14.035 -165.611,-14.035 -165.195,-13.618 -164.017,-13.618 -162.939,-12.54 -159.632,-12.54 -158.868,-13.304 -158.868,-13.457 -155.82,-16.505 -155.82,-23.765 -152.518,-27.067 -152.518,-30.854 -152.518,-30.861 -152.921,-45.243 -152.921,-45.453 -152.772,-45.602 -145.464,-45.602 ; v1(-176.14,-45.094) -176.013,-45.221 -174.703,-45.221 -173.077,-46.847 -172.881,-46.847 -172.798,-46.931 -172.723,-46.856 -172.61,-46.969 -172.073,-47.507 -170.581,-47.507 v1(-170.511,-47.437) ; v1(-145.717,-48.966) -145.717,-48.692 -145.323,-48.297 -145.323,-47.823 -145.464,-47.682 -145.464,-45.602 ; v1(-132.893,-70.277) -132.943,-70.226 -132.943,-65.905 v1(-132.833,-65.795) ; v1(-102.353,-66.684) -102.353,-63.941 -101.159,-62.747 -99.94,-62.747 -99.813,-62.62 -98.947,-62.62 v1(-98.797,-62.47) ; -145.464,-45.602 -145.464,-45.37 -145.315,-45.221 -140.747,-45.221 -140.298,-44.773 -138.869,-44.773 v1(-138.675,-44.967) -136.14,-44.967 -132.391,-48.716 -132.391,-49.91 -139.437,-56.956 -139.437,-58.044 -133.976,-63.505 -133.976,-64.559 v1@-133.013,-65.522 ; v1@-133.013,-65.522 v1@-132.56,-65.522 ; v1@-133.013,-65.522 v1@-132.56,-65.522 ; v1@-133.013,-65.522 v1@-132.56,-65.522 ; v1@-132.56,-65.968 v1@-132.56,-65.522 ; v1@-132.56,-65.968 v1@-132.56,-65.522 ; v1@-132.56,-65.968 v1@-132.56,-65.522
  Layer 2 w0.254: v1(-213.316,-44.528) -213.591,-44.528 -214.145,-45.082 -214.206,-45.082 -214.494,-45.37 -214.494,-47.888 -213.351,-49.031 -177.051,-49.031 -176.14,-48.12 v1(-176.14,-45.094) ; v1(-132.833,-65.795) -131.402,-64.364 -106.724,-64.364 -105.935,-65.154 -105.935,-65.936 -105.401,-66.47 -105.401,-66.724 -104.806,-67.319 -103.155,-67.319 -102.52,-66.684 v1(-102.353,-66.684) ; v1(-98.797,-62.47) -98.648,-62.47 -98.14,-62.978 -96.97,-62.978 -96.947,-63.001 -90.923,-63.001 ; v1(-95.701,-45.856) -95.476,-45.856 -94.841,-46.491 -91.072,-46.491 -90.923,-46.64 -90.923,-63.001 ; v1(-52.698,-63.533) -52.849,-63.382 -55.219,-63.382 -55.727,-63.89 -55.821,-63.89 -56.688,-64.757 -85.865,-64.757 -87.621,-63.001 -90.923,-63.001
NetU1_11: U1.11 U2.11 U3.11 U4.11 U5.11 U10.57 U11.11 U12.11 U13.11 U14.11 U15.11 | length 376
  Top Layer w0.15: v1(-148.683,-51.063) -148.573,-51.063 -147.749,-51.887 -147.741,-51.887 -147.461,-52.168 -147.461,-52.995 U10.57@-147.44,-53.016
  Top Layer w0.254: U15.11@-216.218,-46.368 -213.279,-46.368 v1(-213.182,-46.464) ; U1.11@-210.103,-68.077 -205.775,-68.077 -205.54,-68.311 -204.826,-68.311 v1(-204.632,-68.506) ; v1(-183.275,-44.101) -181.77,-45.606 U14.11@-178.626,-45.606 ; v1(-174.87,-68.335) -174.595,-68.335 -174.21,-67.95 U2.11@-172.511,-67.95 ; v1(-144.136,-46.237) -137.532,-46.237 -136.958,-45.663 -136.958,-45.631 -136.582,-45.256 -135.731,-45.256 U13.11@-135.7,-45.225 ; U3.11@-130.22,-68.585 -128.357,-68.585 -126.829,-70.113 -125.467,-70.113 v1(-125.36,-70.006) ; v1(-106.08,-43.824) -106.08,-43.907 -105.016,-44.971 U12.11@-98.489,-44.971 ; U4.11@-99.867,-66.68 -99.836,-66.711 -98.985,-66.711 -98.326,-67.37 -97.189,-67.37 -96.784,-66.964 v1(-96.509,-66.964) ; v1(-66.539,-44.205) -66.413,-44.331 -65.523,-44.331 -65.396,-44.458 -58.569,-44.458 U11.11@-58.538,-44.489 ; U5.11@-50.718,-66.807 -49.822,-66.807 -49.597,-66.582 -47.849,-66.582 v1(-47.565,-66.299)
  Layer 1 w0.254: v1(-183.275,-44.101) -183.275,-46.2 -180.255,-49.22 -180.255,-50.174 ; v1(-174.87,-68.335) -180.255,-62.95 -180.255,-50.174 ; v1(-148.683,-51.063) -148.708,-51.038 -148.708,-50.047 -151.502,-47.253 -158.277,-47.253 -159.547,-45.983 -166.043,-45.983 -166.678,-46.618 -167.544,-46.618 -169.215,-48.289 -169.215,-51.041 -169.364,-51.19 -179.239,-51.19 -180.255,-50.174 ; v1(-144.136,-46.237) -144.136,-49.758 -143.773,-50.121 -143.773,-54.427 -137.538,-60.662 -134.484,-63.716 -134.484,-67.613 -133.836,-68.261 -133.836,-69.899 -133.976,-70.039 -133.976,-70.788 -133.471,-71.293 -131.689,-71.293 -131.322,-70.926 -126.056,-70.926 -125.36,-70.229 v1(-125.36,-70.006) ; v1(-106.08,-43.824) -106.163,-43.907 -106.163,-63.088 -103.369,-65.882 -103.369,-67.105 -102.774,-67.7 -101.286,-67.7 -100.956,-67.37 -97.189,-67.37 -96.784,-66.964 v1(-96.509,-66.964)
  Layer 2 w0.254: v1(-213.182,-46.464) -211.124,-48.523 -187.697,-48.523 v1(-183.275,-44.101) ; v1(-204.632,-68.506) -204.826,-68.311 -204.826,-67.528 -204.842,-67.512 -204.842,-67.065 -203.826,-66.049 -175.679,-66.049 -174.87,-66.858 v1(-174.87,-68.335) ; v1(-125.36,-70.006) -125.34,-69.986 -124.197,-69.986 -123.181,-68.97 -103.583,-68.97 -103.524,-68.911 -98.458,-68.911 -96.512,-66.964 v1(-96.509,-66.964) ; v1(-106.08,-43.824) -105.805,-43.824 -105.314,-44.315 -104.954,-44.315 -104.937,-44.332 -98.403,-44.332 -96.976,-42.905 -96.135,-42.905 -95.089,-43.951 -80.551,-43.951 -80.297,-44.205 v1(-66.539,-44.205)
  Bottom Layer w0.254: v1(-148.683,-51.063) -149.47,-50.276 -149.47,-48.396 -146.041,-44.967 -145.406,-44.967 v1(-144.136,-46.237) ; v1(-66.539,-44.205) -66.539,-44.332 -64.761,-46.11 -58.555,-46.11 -51.608,-53.058 -51.608,-64.847 -50.156,-66.299 v1(-47.565,-66.299)
NetU1_13: U1.13 U2.13 U3.13 U4.13 U5.13 U10.29 U11.13 U12.13 U13.13 U14.13 U15.13 | length 426.3
  Top Layer w0.15: U10.29@-144.94,-64.616 -144.94,-70.502 -145.169,-70.732 -145.169,-71.804 -144.976,-71.997 -142.972,-71.997 -140.834,-69.859 v1(-140.834,-68.589) -140.18,-67.935 U3.13@-136.97,-67.935
  Top Layer w0.254: U1.13@-216.853,-67.427 -214.979,-67.427 -213.374,-65.823 -209.439,-65.823 ; U15.13@-209.468,-47.018 -209.468,-47.064 -209.439,-47.092 -209.439,-65.823 ; v1(-174.008,-44.48) -174.008,-44.755 -173.519,-45.244 -173.519,-45.614 -172.877,-46.256 U14.13@-171.662,-46.256 ; -172.877,-46.287 -173.93,-47.34 -173.93,-48.828 -174.362,-49.26 -174.362,-63.058 -178.604,-67.3 U2.13@-179.261,-67.3 -179.924,-67.3 -180.159,-67.065 -198.459,-67.065 -199.702,-65.823 -209.439,-65.823 ; v1(-165.599,-46.999) -166.342,-46.256 U14.13@-171.631,-46.256 ; v1@-140.707,-68.462 -140.707,-65.617 -139.564,-64.474 -134.992,-64.474 -131.436,-60.918 -131.436,-56.803 -131.157,-56.524 v1(-128.388,-56.524) ; U13.13@-128.964,-45.889 U13.13@-128.95,-45.875 -126.866,-45.875 -126.377,-46.364 v1(-126.102,-46.364) ; v1(-108.183,-66.049) -108.173,-66.04 -106.627,-66.04 U4.13@-106.617,-66.03 ; U12.13@-91.739,-45.621 -86.026,-45.621 -78.54,-53.107 -78.54,-60.757 -78.019,-61.278 -75.58,-61.278 -73.998,-61.278 -69.12,-66.157 -59.357,-66.157 ; v1(-61.154,-67.954) -60.443,-67.243 -60.443,-66.876 -59.848,-66.281 -59.481,-66.281 -59.357,-66.157 ; U5.13@-57.468,-66.157 -59.357,-66.157 ; U11.13@-51.788,-45.139 -51.735,-45.191 v1(-51.735,-46.618) ; U14.13@-171.662,-46.287 U14.13@-171.631,-46.256 ; U14.13@-171.662,-46.287 U14.13@-171.631,-46.256 ; U14.13@-171.662,-46.287 U14.13@-171.631,-46.256
  Layer 1 w0.254: v1(-128.388,-56.524) -128.388,-48.65 v1(-126.102,-46.364) ; v1(-61.154,-67.954) -60.879,-67.954 -60.52,-68.313 -53.607,-68.313 -51.682,-66.389 -51.682,-57.128 -51.745,-57.065 -51.745,-46.627 v1(-51.735,-46.618)
  Layer 2 w0.254: v1(-140.834,-68.589) -136.486,-68.589 -135.851,-67.954 -110.241,-67.954 -108.336,-66.049 v1(-108.183,-66.049) -108.091,-66.141 -107.167,-66.141 -106.491,-66.817 -106.491,-67.071 -105.227,-68.335 -101.849,-68.335 -98.589,-65.075 -97.747,-65.075 -96.874,-65.948 -93.984,-65.948 -92.868,-67.065 -62.043,-67.065 v1(-61.154,-67.954)
  Bottom Layer w0.254: v1(-174.008,-44.48) -173.902,-44.586 -170.004,-44.586 -167.885,-46.705 -167.885,-47.587 -161.478,-53.994 -149.917,-53.994 -149.699,-54.213 ; v1(-165.599,-46.999) -165.45,-46.999 -164.942,-47.507 -161.268,-47.507 -160.506,-46.745 -155.907,-46.745 -153.089,-43.927 -153.089,-43.848 -150.272,-41.03 -149.43,-41.03 -148.835,-41.625 -148.835,-42.467 -149.938,-43.57 -150.657,-43.57 -155.61,-48.523 -163.567,-48.523 -163.716,-48.672 -163.716,-48.882 -163.313,-49.285 -150.127,-49.285 -149.978,-49.434 -149.978,-50.746 -149.699,-51.025 -149.699,-54.213 ; v1(-126.102,-46.364) -128.388,-48.65 -128.388,-49.35 -130.609,-51.571 -132.509,-51.571 -135.151,-54.213 -149.699,-54.213
NetU1_14: U1.14 U2.14 U3.14 U4.14 U5.14 U10.56 U11.14 U12.14 U13.14 U14.14 U15.14 | length 393.6
  Top Layer w0.15: v1(-149.851,-42.046) -148.048,-43.849 -148.048,-47.547 ; U10.56@-146.94,-53.016 -146.94,-48.655 -147.969,-47.626 -147.969,-46.784 -147.374,-46.189 -146.339,-46.189 -144.767,-47.761 -142.909,-49.62 -142.909,-53.886 -143.581,-54.558 -143.611,-54.558 -145.616,-56.563 -145.704,-56.651 v1(-146.197,-57.305)
  Top Layer w0.254: U1.14@-216.853,-68.077 -216.822,-68.108 -215.903,-68.108 -215.088,-68.923 -215.088,-68.991 -214.395,-69.684 v1(-214.395,-69.739) ; U15.14@-209.468,-46.368 -209.437,-46.399 -208.586,-46.399 -208.017,-46.968 v1(-208.017,-64.779) ; U2.14@-179.261,-67.95 -177.689,-67.95 -177.177,-68.462 v1(-176.902,-68.462) ; v1(-174.332,-42.731) -173.599,-43.464 -173.588,-43.464 -172.943,-44.109 -172.943,-45.177 -172.544,-45.575 -171.907,-45.575 U14.14@-171.876,-45.606 ; v1(-139.691,-66.43) -136.974,-66.43 -135.713,-67.691 -135.713,-68.179 -136.088,-68.554 -136.939,-68.554 U3.14@-136.97,-68.585 ; v1(-131.837,-44.185) -131.837,-44.448 -131.081,-45.203 -128.971,-45.203 U13.14@-128.95,-45.225 ; U4.14@-106.617,-66.68 -105.274,-66.68 -105.091,-66.497 ; v1(-104.385,-66.303) v1@-104.325,-66.363 ; U12.14@-91.739,-44.971 -91.739,-45.033 -91.77,-45.002 -92.552,-45.002 -92.583,-45.033 -92.652,-45.033 -92.996,-45.377 -92.996,-45.865 -92.652,-46.209 -86.156,-46.209 -81.398,-50.967 -81.398,-60.185 -81.547,-60.334 -102.523,-60.334 -103.369,-61.18 -103.369,-64.779 -104.191,-65.601 v1@-104.191,-66.228 ; U5.14@-57.468,-66.807 -56.211,-66.807 -55.384,-65.981 -55.384,-65.608 v1(-55.19,-65.414) ; v1(-53.966,-44.713) -53.691,-44.713 -53.467,-44.489 U11.14@-51.788,-44.489 ; -105.091,-66.497 v1@-104.325,-66.497 ; -105.091,-66.497 v1@-104.325,-66.497 ; -105.091,-66.497 v1@-104.325,-66.497 ; v1@-104.325,-66.497 v1@-104.258,-66.43 ; v1@-104.325,-66.497 v1@-104.258,-66.43 ; v1@-104.325,-66.497 v1@-104.258,-66.43 ; v1@-104.325,-66.363 v1@-104.258,-66.43 ; v1@-104.325,-66.363 v1@-104.191,-66.228 ; v1@-104.325,-66.363 v1@-104.191,-66.228 ; v1@-104.325,-66.363 v1@-104.191,-66.228
  Layer 1 w0.254: v1(-214.395,-69.739) -214.389,-69.732 -212.634,-69.732 -212.253,-70.113 -211.411,-70.113 -211.03,-69.732 -210.735,-69.732 -208.017,-67.014 v1(-208.017,-64.779) ; v1(-146.197,-57.305) -146.011,-57.492 -145.454,-57.492 -144.517,-58.429 -144.517,-60.347 -139.691,-65.173 v1(-139.691,-66.43) ; v1(-55.19,-65.414) -53.764,-63.537 -53.712,-63.469 -53.712,-45.37 -53.772,-45.31 -53.772,-44.907 v1(-53.966,-44.713)
  Layer 2 w0.254: v1(-214.395,-69.739) -213.587,-68.93 -213.102,-68.93 -212.253,-68.081 -209.638,-68.081 -209.49,-68.23 -209.49,-69.798 -208.894,-70.393 -205.082,-70.393 -201.246,-66.557 -178.045,-66.557 -177.444,-67.158 -177.444,-67.645 -176.902,-68.187 v1(-176.902,-68.462) ; v1(-149.851,-42.046) -146.89,-42.046 -142.445,-46.491 -132.412,-46.491 -131.817,-45.896 -131.817,-44.205 v1(-131.837,-44.185) ; v1(-139.691,-66.43) -139.691,-64.993 -136.683,-61.985 -134.644,-61.985 -132.772,-63.856 -106.046,-63.856 ; v1(-104.385,-66.303) -104.66,-66.303 -104.956,-66.007 -105.018,-66.007 -105.167,-65.859 -105.167,-64.736 -106.046,-63.856 ; v1(-55.19,-65.414) -55.384,-65.608 -56.103,-65.608 -56.268,-65.773 -86.286,-65.773 -87.534,-64.525 -96.86,-64.525 -97.326,-64.059 -104.978,-64.059 -105.181,-63.856 -106.046,-63.856
  Bottom Layer w0.254: v1(-176.902,-68.462) -176.735,-68.462 -175.846,-69.351 -174.449,-69.351 -173.854,-68.756 -173.854,-67.943 -173.854,-67.869 -173.81,-67.8 -173.616,-67.517 -173.616,-56.973 -174.108,-56.481 -174.108,-45.816 -174.703,-45.221 -175.024,-44.901 -175.024,-43.475 -174.332,-42.783 v1(-174.332,-42.731) ; v1(-149.851,-42.046) -155.058,-47.253 -160.295,-47.253 -161.057,-48.015 -166.02,-48.015 -166.615,-47.42 -166.615,-45.92 -166.361,-45.666 -166.361,-44.165 -167.795,-42.731 v1@-174.298,-42.731 ; v1@-174.315,-42.714 v1@-174.298,-42.731 ; v1@-174.315,-42.714 v1@-174.298,-42.731 ; v1@-174.315,-42.714 v1@-174.298,-42.731
NetU7_1: U7.1 U9.5 | length 18.7
  Top Layer w0.254: v1(-13.453,-46.745) v1@-13.453,-46.898 ; U9.5@-19.809,-47.761 U9.5@-18.818,-47.761 ; U9.5@-19.809,-47.761 U9.5@-18.818,-47.761 ; U9.5@-19.809,-47.761 U9.5@-18.818,-47.761 ; U9.5@-18.818,-47.761 ccw(c-18.818,-46.46) v1(-17.898,-47.38) ; U9.5@-18.818,-47.761 ccw(c-18.818,-46.46) v1(-17.898,-47.38) ; U9.5@-18.818,-47.761 ccw(c-18.818,-46.46) v1(-17.898,-47.38) ; U7.1@-15.388,-48.508 U7.1@-15.063,-48.508 ; U7.1@-15.388,-48.508 U7.1@-15.063,-48.508 ; U7.1@-15.388,-48.508 U7.1@-15.063,-48.508 ; U7.1@-15.063,-48.508 v1@-13.453,-46.898 ; U7.1@-15.063,-48.508 v1@-13.453,-46.898 ; U7.1@-15.063,-48.508 v1@-13.453,-46.898
  Layer 1 w0.254: v1(-17.898,-47.38) -14.255,-47.38 -13.62,-46.745 v1(-13.453,-46.745)
NetU7_4: U7.4 U9.4 | length 14.4
  Top Layer w0.254: U7.4@-15.388,-50.387 U7.4@-15.388,-50.458 ; U9.4@-19.809,-49.031 -18.511,-49.031 ; U9.4@-19.809,-49.031 -18.511,-49.031 ; U9.4@-19.809,-49.031 -18.511,-49.031 ; -18.511,-49.031 cw(c-18.511,-49.898) v1(-17.898,-49.285) ; -18.511,-49.031 cw(c-18.511,-49.898) v1(-17.898,-49.285) ; -18.511,-49.031 cw(c-18.511,-49.898) v1(-17.898,-49.285) ; v1@-15.388,-51.573 ccw(c-14.852,-51.573) v1(-15.231,-51.952) ; v1@-15.388,-51.573 ccw(c-14.852,-51.573) v1(-15.231,-51.952) ; v1@-15.388,-51.573 ccw(c-14.852,-51.573) v1(-15.231,-51.952) ; v1@-15.388,-51.573 U7.4@-15.388,-50.458 ; v1@-15.388,-51.573 U7.4@-15.388,-50.458 ; v1@-15.388,-51.573 U7.4@-15.388,-50.458
  Layer 1 w0.254: v1(-17.898,-49.285) v1(-15.231,-51.952)
NetU9_12: U9.12 U10.45 | length 116.6
  Top Layer w0.15: U10.45@-140.961,-56.565 -137.539,-56.565 -137.371,-56.397 -133.341,-56.397 v1(-130.122,-53.178)
  Top Layer w0.254: U10.45@-141.39,-56.566 U10.45@-140.961,-56.566 ; v1(-44.949,-47.634) -44.885,-47.698 -36.122,-47.698 U9.12@-36.059,-47.761
  Layer 2 w0.254: v1(-130.122,-53.178) -128.58,-51.636 -128.58,-51.152 -125.698,-48.269 -125.427,-48.269 -122.379,-45.221 -97.888,-45.221 -97.69,-45.023 -96.306,-45.023 -96.122,-44.84 -95.009,-44.84 -94.628,-44.459 -80.762,-44.459 -80,-45.221 -61.006,-45.221 -59.173,-47.054 -59.173,-49.833 -57.816,-51.19 -55.49,-51.19 -51.934,-47.634 v1(-44.949,-47.634)
NetU9_13: U9.13 U10.44 | length 163.9
  Top Layer w0.15: v1(-146.049,-60.251) -145.993,-60.195 -145.993,-59.183 -143.885,-57.075 -141.398,-57.075 U10.44@-141.39,-57.066
  Top Layer w0.254: v1(-44.949,-49.158) -44.885,-49.095 -36.122,-49.095 U9.13@-36.059,-49.031
  Layer 2 w0.254: v1(-146.049,-60.251) -145.988,-60.251 -144.763,-61.477 -134.433,-61.477 -132.562,-63.348 -99.356,-63.348 -99.218,-63.486 -97.181,-63.486 -97.158,-63.509 -87.831,-63.509 -86.075,-65.265 -56.478,-65.265 -55.611,-64.398 -53.924,-64.398 -53.772,-64.549 -52.085,-64.549 -48.759,-61.223 -44.528,-61.223 -40.451,-57.146 ccw(c-40.631,-56.967) -40.428,-57.119 ccw(c-40.631,-56.967) -40.377,-56.967 ; v1(-44.949,-49.158) v1@-44.822,-49.031 ; v1@-44.822,-49.031 -40.631,-49.031 ; v1@-44.822,-49.031 -40.631,-49.031 ; v1@-44.822,-49.031 -40.631,-49.031 ; -40.631,-49.031 cw(c-40.631,-49.285) -40.377,-49.285 ; -40.631,-49.031 cw(c-40.631,-49.285) -40.377,-49.285 ; -40.631,-49.031 cw(c-40.631,-49.285) -40.377,-49.285 ; -40.377,-56.967 -40.377,-49.285 ; -40.377,-56.967 -40.377,-49.285 ; -40.377,-56.967 -40.377,-49.285
pads on no net: C10. J1. J2. J3. J4. J5. J6.2 J6.3 J6.4 J6.5 J6.6 J6.8 J6.10 J6.11 J6.12 J6.14 J6.15 J6.16 J7. J8. J9. J10. J11. U1.16 U1.17 U1.18 U1.19 U2.16 U2.17 U2.18 U2.19 U3.16 U3.17 U3.18 U3.19 U4.16 U4.17 U4.18 U4.19 U5.16 U5.17 U5.18 U5.19 U6.2 U6.7 U6.8 U9.3 U9.6 U9.11 U9.14 U10.2 U10.3 U10.4 U10.10 U10.11 U10.24 U10.25 U10.26 U10.27 U10.28 U10.33 U10.34 U10.35 U10.36 U10.37 U10.38 U10.41 U10.42 U10.43 U10.50 U10.51 U10.52 U10.53 U10.54 U10.58 U10.59 U10.61 U10.62 U11.16 U11.17 U11.18 U11.19 U12.16 U12.17 U12.18 U12.19 U13.16 U13.17 U13.18 U13.19 U14.16 U14.17 U14.18 U14.19 U15.16 U15.17 U15.18 U15.19 U16.2
copper on no net: | length 1.4
  Top Layer w0.254: v2(-138.294,-36.966) -138.294,-37.933 -138.167,-38.06 ; -35.488,-74.787 -35.488,-74.507

## Polygon pours and split planes (outlines as drawn)
LV_GND on Bottom Layer "Bottom Layer-GND 1" (solid, pour order 4): -20.701,-84.074 ccw(c-18.161,-84.074) -18.161,-86.614 -0.127,-86.614 cw(c-0.127,-86.106) -0.635,-86.106 -0.635,-28.956 -20.701,-28.956
GND on Bottom Layer "GND_L04_P005" (solid, remove dead copper, pour order 5): -230.505,-11.811 -230.505,-96.52 -34.417,-96.52 -34.417,-11.811

## Silkscreen, mask and mechanical layers (free items; w line width, h text height)
Top Overlay:
  drawing of 135 lines, arcs and shapes, not listed
  text "90 degree header space" at -177.41,-3.819 h1.52 r180
  text "2026 Temp sense Designed by Mitchell Donahue" at -0.372,-47.761 h1 r90
  text "High Voltage" at -73.397,-52.206 h1.52 r90
  text "Low Voltage" at -0.245,-93.608 h1.52 r90
  text "<-9.9mm->" at -34.408,-97.291 h1.52
  text "90 degree header space" at -209.668,-105.165 h1.52
Mechanical 1:
  lines w0.254: -32.884,-95.513 -23.011,-95.513 -23.011,-8.01 -32.884,-8.01 -32.884,-95.513
  lines w1.5: -237.236,-107.442 ccw(c-235.966,-107.442) -235.966,-108.712 -0.381,-108.712 ccw(c-0.381,-107.442) 0.889,-107.442 0.777,-0.773 ccw(c-0.758,-0.773) -0.758,0.762 -127.508,0.762 -235.966,0.762 ccw(c-235.966,-0.508) -237.236,-0.508 -237.236,-107.442